# Altium PCB 1 .PcbDoc
Units mm, origin at the board's own origin, x right, y up, seen from the top; angles counter-clockwise.
Board outline 8.2 x 3.8 mm, 2 copper layers (Top, Bottom), stack 0.323 mm thick; 5 components, 3 nets, 11 pads, 5 vias.
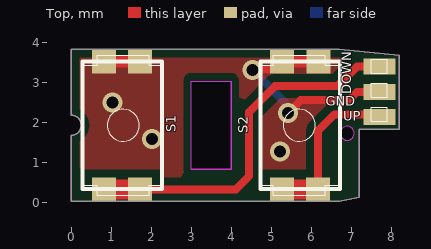
[diagram p0: Top view]
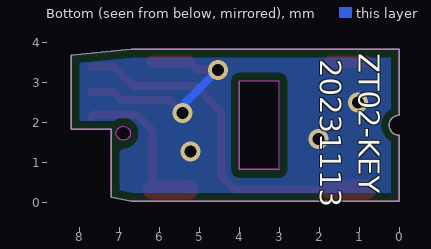
[diagram p1: Bottom view, seen from below]

## Layer stack, top to bottom
Solder Mask Top: solder mask 0.0102, Solder Resist, Dk 3.5
Top: signal copper 0.0343
Dielectric 1: dielectric 0.254, FR-4, Dk 4.3
Bottom: signal copper 0.0343
Solder Mask Bottom: solder mask 0.0102, Solder Resist, Dk 3.5

## Board outline
-0.005,0.032 -0.005,1.682 ccw(c-0.005,1.932) -0.005,2.182 -0.005,3.832 6.695,3.832 8.195,3.682 8.195,1.832 7.195,1.832 7.195,0.132 6.695,0.032
cut-out: 6.72,1.73 ccw(c6.895,1.73) 6.895,1.555 ccw(c6.895,1.73) 7.07,1.73 ccw(c6.895,1.73) 6.895,1.905 ccw(c6.895,1.73)
cut-out: 3,0.832 3,3.032 3.99,3.032 3.99,0.832

## Design rules (kind name [scope] priority, off if disabled: settings)
Clearance "Clearance - Default - DEFAULT- SMD" [All] p1: gap=0.152 ignorepadtopadclearanceinfootprint=FALSE except(0.2: Arc-Fill Arc-Poly Arc-Region Track-Fill Track-Poly Track-Region SMDPad-Fill SMDPad-Poly SMDPad-Region THPad-Fill THPad-Poly THPad-Region Via-Fill Via-Poly Via-Region Fill-Fill Fill-Poly Fill-Region Poly-Poly Poly-Region Region-Region)
ComponentClearance "ComponentClearance - Default - DEFAULT" [All] p1: gap=0.152 collisioncheckmode=3 verticalgap=0.254 showdistances=FALSE
DiffPairsRouting [All] p1: maxlimit=0.2 minlimit=0.2 mostfreqgap=0.2 toplayer_minwidth=0.2 toplayer_maxwidth=0.2 toplayer_prefwidth=0.2 bottomlayer_minwidth=0.2 bottomlayer_maxwidth=0.2 bottomlayer_prefwidth=0.2 maxuncoupledlength=12.7
FanoutControl Fanout_Small [(CompPinCount < 5)] p3: bgadir=Out bgaviamode=Centered fanoutstyle=Auto fanoutdirection=OutThenIn viagrid=0.025 // Fanout_Small (Default Rule)
FanoutControl Fanout_SOIC [IsSOIC] p4: bgadir=Out bgaviamode=Centered fanoutstyle=Auto fanoutdirection=Alternating viagrid=0.025 // Fanout_SOIC (Default Rule)
HoleToHoleClearance "HoleToHoleClearance - Default - DEFAULT" [All] p1: gap=0.152 allowstackedmicrovias=TRUE
Length "Default Length" [All] p1: maxlimit=1270 minlimit=0
MaxMinImpedance "Default Impedance" [All] p1: minimum=50.00 maximum=150.0
MinimumSolderMaskSliver [All] p1: minsoldermaskwidth=0
ParallelSegment "Default Parallel Segment Adjasent" [All] p1: limit=25.4 gap=5.08
ParallelSegment "Default Parallel Segment Same Layer" [All] p2: limit=25.4 gap=5.08
PlaneConnect "Default PlaneConnect" [All] p1: planeconnectstyle=Direct reliefexpansion=0.508 reliefentries=4 reliefconductorwidth=0.381 reliefairgap=0.254
PolygonConnect "PolygonConnect - Default SMT" [IsSMTPin] p1: connectstyle=Direct reliefconductorwidth=0.254 reliefentries=4 polygonreliefangle="90 Angle" airgapwidth=0.254
PolygonConnect "PolygonConnect - Default Pad" [All] p2: connectstyle=Direct reliefconductorwidth=0.381 reliefentries=4 polygonreliefangle="45 Angle" airgapwidth=0.254
RoutingLayers "RoutingLayers - Default - DEFAULT" [All] p1: top layer_v5=TRUE bottom layer_v5=TRUE
RoutingPriority "RoutingPriority - Default - DEFAULT" [All] p1: routingpriority=3
RoutingTopology "Default Routing Topology" [All] p1: topology=Shortest
RoutingVias "RoutingVias - Default - DEFAULT" [All] p1: holewidth=0.3 width=0.5 viastyle="Through Hole" minholewidth=0.3 minwidth=0.5 maxholewidth=0.4 maxwidth=0.6
SMDToCorner "SMDToCorner - Default - DEFAULT" [All] p1: distance=60000
SilkToSilkClearance [All] p1: silktosilkclearance=0
SilkToSolderMaskClearance [IsPad] p1: minsilkscreentomaskgap=0 clearancetoexposedcopper=TRUE
SolderMaskExpansion [All] p1: expansion=0.102 istentingtop=FALSE
Width "Default Width" [All] p1: maxlimit=5.08 minlimit=0.152 preferedwidth=0.61
18 further rules are at their usual default settings.

## Components (designator, comment, footprint, x,y, rotation, side; value= is the part's Value field where it differs from the comment)
DOWN "" PAD4 7.696,3.404 r0 top
GND "" PAD4 7.696,2.769 r180 top
S1 "" SWITCH 1.266,1.931 r0 top
S2 "" SWITCH 5.719,1.931 r0 top
UP "" PAD4 7.696,2.134 r0 top

## Footprints (in the part's own frame and the unit in brackets; to place one, negate y for a bottom-side part, rotate by r counter-clockwise, add the part's x,y. Pads: shape width x height; smd on the part's side, far side on the other; paste and mask are expansions set on the pad)
PAD4 [mm]
  rect 0.8x0.4 smd: 1(0,0)
SWITCH [mm]
  rect 0.6x0.6 smd: 1(-0.451,-1.6) 2(0.449,-1.6) 3(0.453,1.6) 4(-0.453,1.6)
  silkscreen extent -0.99,-1.59 1,1.6

## Part data
DOWN GND UP: library part TESTPOINT, "TestPoint", PCB DECAL=TP01
S1 S2: library part SWITCH

## Via types
v1: diameter 0.5, hole 0.3, Top to Bottom, tented both sides, 5 vias

## Nets (pads, with @x,y where several pads share a name; then routed paths per layer and width w, separated by ;. In a path a pad name is that pad's centre, name@x,y a point inside that pad or via, vN(x,y) a via of type N, cw(c..) or ccw(c..) an arc to the next point about the centre after c; other vN are vias at no path point)
GND: GND.1 S1.3 S1.4 S2.3 S2.4 | length 6.6
  Top w0.2: v1(4.531,3.314) 4.547,3.331 5.066,3.331 S2.4 ; v1(5.41,2.235) 5.733,2.558 6.933,2.558 7.144,2.769 GND.1
  Top w0.3: S1.4 S1.3 ; S2.4 S2.3
  Bottom w0.2: v1(4.531,3.314) 5.353,2.492 5.353,2.293 v1(5.41,2.235)
  other v1: 5.216,1.282 2.016,1.587 1.025,2.501
NetDOWN_1: DOWN.1 S1.1 S1.2 | length 9.1
  Top w0.2: S1.2 4.115,0.33 4.445,0.66 4.445,2.261 5.094,2.91 6.65,2.91 7.144,3.404 DOWN.1
  Top w0.5: S1.1 S1.2
NetS2_1: S2.1 S2.2 UP.1 | length 4.1
  Top w0.2: S2.2 6.168,1.799 6.574,2.205 7.625,2.205 UP.1
  Top w0.5: S2.1 S2.2

## Polygon pours and split planes (outlines as drawn)
GND on Top "GND_L01_P000" (solid, remove dead copper, pour order 0): -0.005,0.032 -0.005,1.682 ccw(c-0.005,1.932) -0.005,2.182 -0.005,3.832 6.695,3.832 8.195,3.682 8.195,1.832 7.195,1.832 7.195,0.132 6.695,0.032
GND on Bottom "GND_L02_P001" (solid, remove dead copper, pour order 1): -0.005,0.032 -0.005,1.682 ccw(c-0.005,1.932) -0.005,2.182 -0.005,3.832 6.695,3.832 8.195,3.682 8.195,1.832 7.195,1.832 7.195,0.132 6.695,0.032

## Keep-outs
Keep-Out Layer:
  circle w0.013: c6.895,1.73 r0.175
  lines w0.013: -11.989,-3.568 -11.917,-3.467 ; -0.005,0.032 -0.005,1.682 ccw(c-0.005,1.932) -0.005,2.182 -0.005,3.832 6.695,3.832 8.195,3.682 8.195,1.832 7.195,1.832 7.195,0.132 6.695,0.032 -0.005,0.032 ; 3,0.832 3.99,0.832 3.99,3.032 3,3.032 3,0.832

## Silkscreen, mask and mechanical layers (free items; w line width, h text height)
Silkscreen Top:
  circle w0.013: c5.695,1.932 r0.4
  circle w0.013: c1.295,1.932 r0.4
  lines w0.013: 0.295,0.432 0.645,0.432 0.645,0.182 1.945,0.182 1.945,0.432 2.295,0.432 2.295,3.432 1.945,3.432 1.945,3.682 0.645,3.682 0.645,3.432 0.295,3.432 0.295,0.432 ; 4.695,0.432 5.045,0.432 5.045,0.182 6.345,0.182 6.345,0.432 6.695,0.432 6.695,3.432 6.345,3.432 6.345,3.682 5.045,3.682 5.045,3.432 4.695,3.432 4.695,0.432 ; 7.495,2.032 7.895,2.032 7.895,2.382 7.495,2.382 7.495,2.032 ; 7.495,2.632 7.895,2.632 7.895,2.982 7.495,2.982 7.495,2.632 ; 7.495,3.232 7.495,3.582 7.895,3.582 7.895,3.232 7.495,3.232
Silkscreen Bottom:
  text "ZT02-KEY" at 1.184,3.734 h0.9 r90
  text "20231113" at 2.149,3.582 h0.9 r90